# EAGLE board Sensor_Board_Try2 (EAGLE 8.0.2)
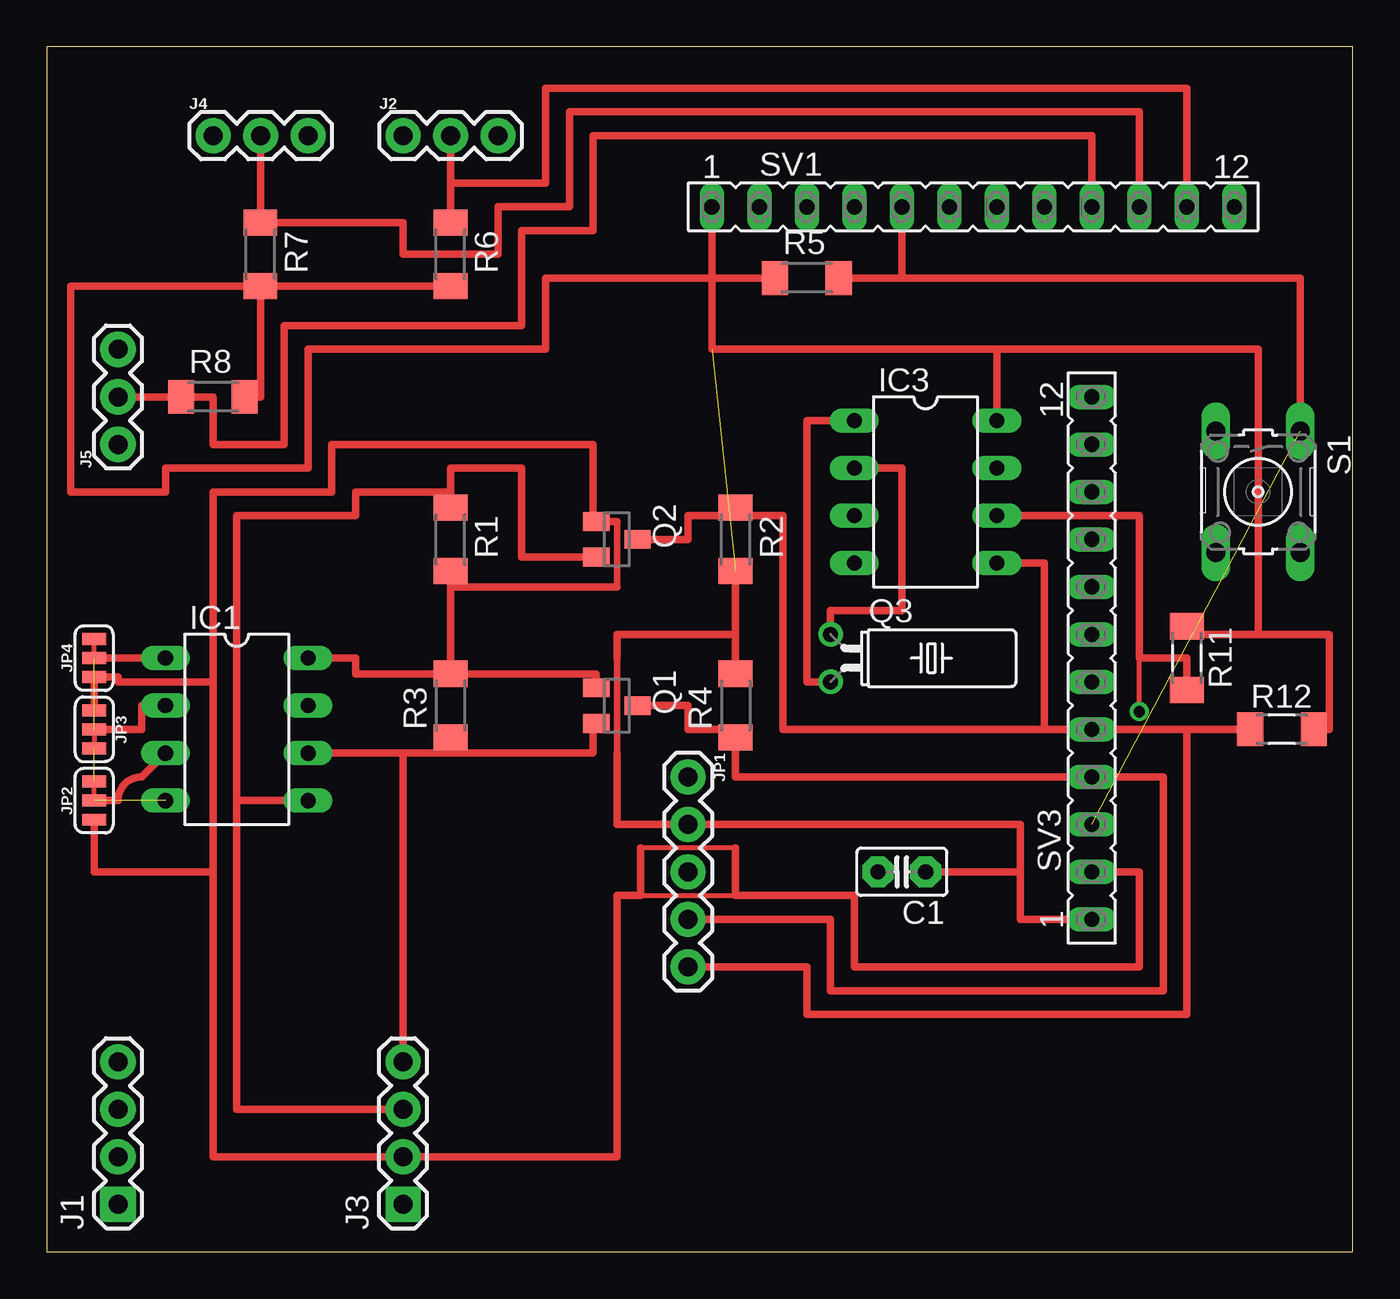
[diagram p0: board, top side]
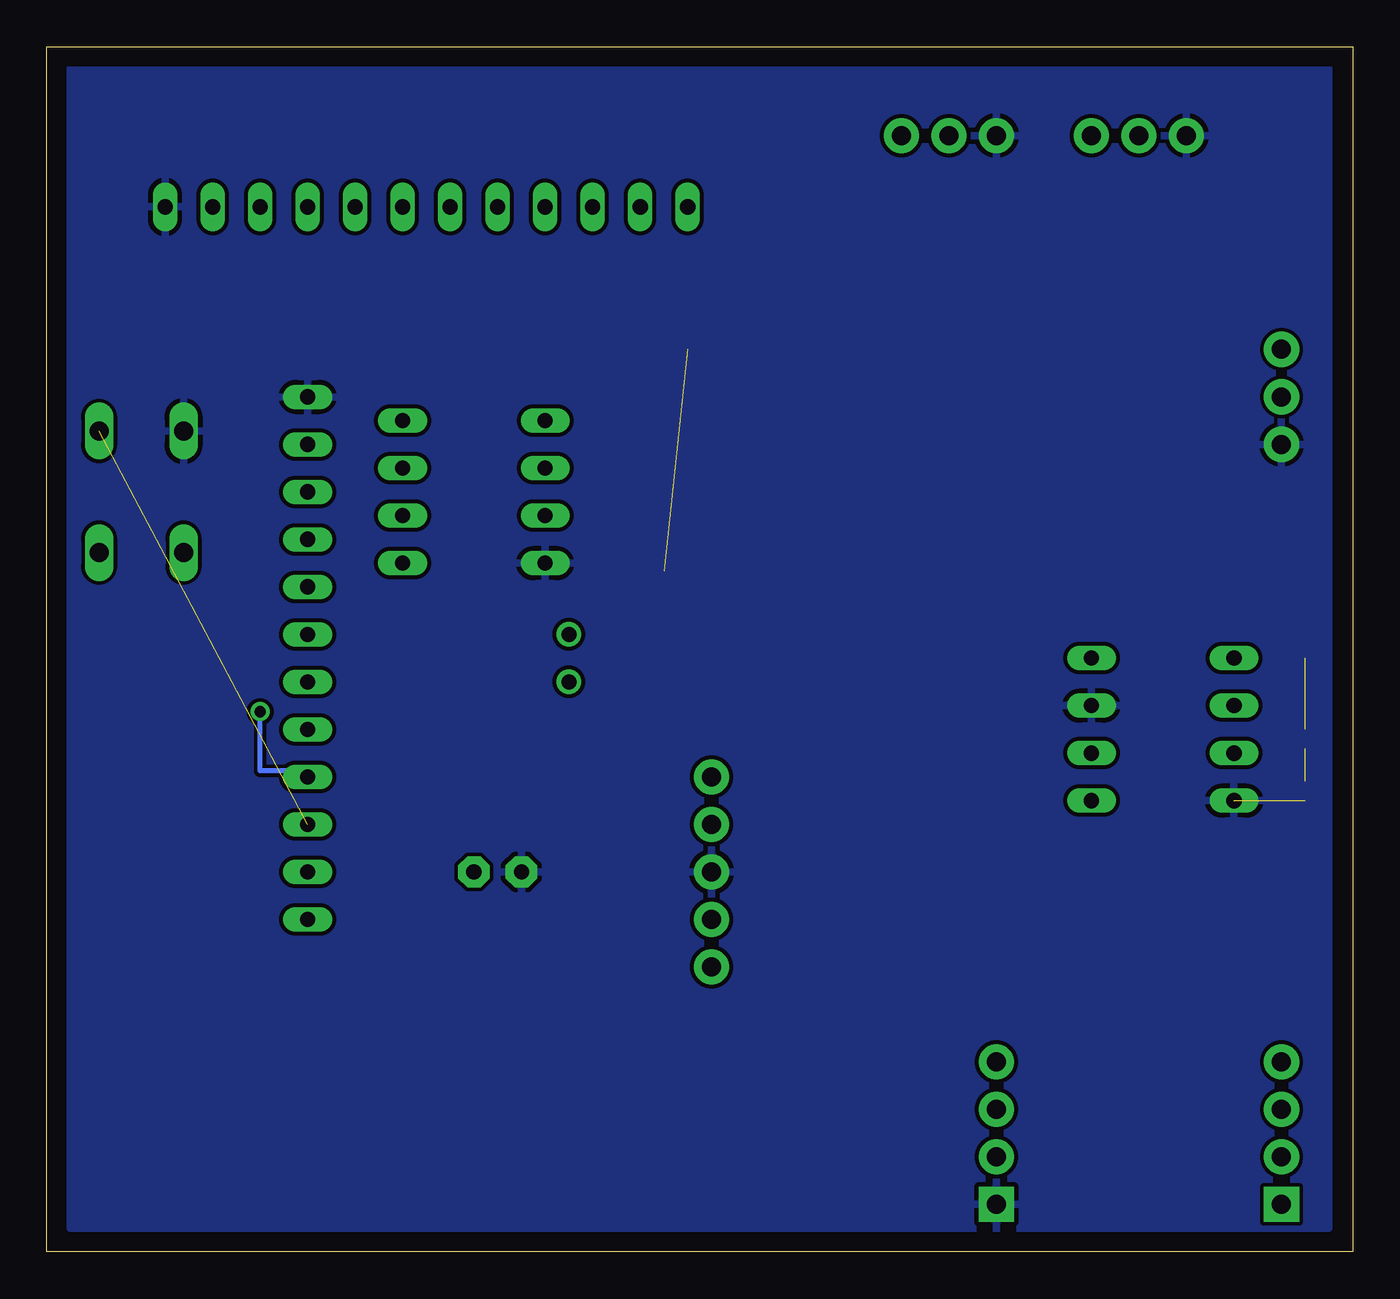
[diagram p1: board, bottom side, seen from below]

Size 69.83 x 64.44 mm. Coordinates in mm from the lower left corner, seen from the top.
Outline: 0,0 69.83,0 69.83,64.44 0,64.44 0,0
Copper layers (1*16): Top 0.035mm / dielectric 1.5mm / Bottom 0.035mm
Design rules "default": minimum track width 10mil, minimum drill 24mil, track to track 8mil, track to pad 8mil, pad to pad 8mil, via to via 8mil, smd to smd 8mil, copper to edge 40mil, drill to drill 8mil, minimum pad ring 10mil, minimum via ring 8mil, stop-mask expansion 4mil, vias tented up to drill 0mil, thermal gap 10mil

## Footprints (pad centres in the part's own frame; a part is rotated, then mirrored left to right if it is on the bottom)
C025-025X050 = drill 0.813 pad 1.676 octagon: 1 -1.27,0; 2 1.27,0
DIL08 = drill 0.813 long: 1 -3.81,-3.81; 2 -1.27,-3.81; 3 1.27,-3.81; 4 3.81,-3.81; 5 3.81,3.81; 6 1.27,3.81; 7 -1.27,3.81; 8 -3.81,3.81
1X04 = drill 1.016 pad 1.88 square: 1 0,0 | drill 1.016 pad 1.88: 2 2.54,0; 3 5.08,0; 4 7.62,0
1X03 = drill 1.016 pad 1.88: 1 0,0; 2 2.54,0; 3 5.08,0
1X05 = drill 1.016 pad 1.88: 1 0,0; 2 2.54,0; 3 5.08,0; 4 7.62,0; 5 10.16,0
SMT-JUMPER_3_1-NC_TRACE_SILK = smd 0.635 x 1.27: 1 -1.016,0; 2 0,0; 3 1.016,0
SOT23 = smd 1 x 1.4: 1 -0.95,-1.1; 2 0.95,-1.1; 3 0,1.1
TC38H = drill 0.813: 1 -1.27,0; 2 1.27,0
M1406 = smd 1.4 x 1.8: 1 -1.7,0; 2 1.7,0
B3F-10XX = drill 1.016 long: 1 -3.251,2.261; 2 3.251,2.261; 3 -3.251,-2.261; 4 3.251,-2.261
FE12 = drill 0.813 long: 1 -13.97,0; 2 -11.43,0; 3 -8.89,0; 4 -6.35,0; 5 -3.81,0; 6 -1.27,0; 7 1.27,0; 8 3.81,0; 9 6.35,0; 10 8.89,0; 11 11.43,0; 12 13.97,0

## Placement (x,y rotation side)
C1  0.1uF  [C025-025X050]  45.72,20.32 180 top
IC1  AT24CP  [DIL08]  10.16,27.94 270 top
IC3  DS1307  [DIL08]  46.99,40.64 270 top
J1  [1X04]  3.81,2.54 90 top
J2  [1X03]  19.05,59.69 0 top
J3  [1X04]  19.05,2.54 90 top
J4  [1X03]  8.89,59.69 0 top
J5  [1X03]  3.81,43.18 90 top
JP1  [1X05]  34.29,25.4 270 top
JP2  JUMPER-SMT_3_1-NC_TRACE_SILK  [SMT-JUMPER_3_1-NC_TRACE_SILK]  2.54,24.13 90 top
JP3  JUMPER-SMT_3_1-NC_TRACE_SILK  [SMT-JUMPER_3_1-NC_TRACE_SILK]  2.54,27.94 270 top
JP4  JUMPER-SMT_3_1-NC_TRACE_SILK  [SMT-JUMPER_3_1-NC_TRACE_SILK]  2.54,31.75 90 top
Q1  BSS123  [SOT23]  30.48,29.21 270 top
Q2  BSS123  [SOT23]  30.48,38.1 270 top
Q3  32.768  [TC38H]  41.91,31.75 270 top
R1  10K  [M1406]  21.59,38.1 270 top
R2  10K  [M1406]  36.83,38.1 270 top
R3  10K  [M1406]  21.59,29.21 90 top
R4  10K  [M1406]  36.83,29.21 90 top
R5  10k  [M1406]  40.64,52.07 0 top
R6  4.7K  [M1406]  21.59,53.34 270 top
R7  4.7K  [M1406]  11.43,53.34 270 top
R8  4.7K  [M1406]  8.89,45.72 0 top
R11  4.7K  [M1406]  60.96,31.75 270 top
R12  4.7K  [M1406]  66.04,27.94 0 top
S1  [B3F-10XX]  64.77,40.64 270 top
SV1  [FE12]  49.53,55.88 0 top
SV3  [FE12]  55.88,31.75 90 top

## Library data of the parts
C1 IC3 R11 R12 = adafruit
IC1 = atmel; MPN: AT24C1024BW-SH-B; OC_FARNELL: 1362646; OC_NEWARK: 03P2044
J1 J3 = SparkFun-Connectors; PROD_ID: CONN-09696
J2 J4 J5 JP1 = SparkFun-Connectors
JP2-JP4 = SparkFun-Jumpers
Q1 Q2 = transistor-small-signal
Q3 = crystal
R1-R4 R6-R8 = resistor
R5 = rcl
S1 = switch-omron; MPN: B3F-1000; OC_FARNELL: 176432; OC_NEWARK: 36M3542
SV1 SV3 = con-lsta; OC_FARNELL: unknown; OC_NEWARK: unknown

## Nets
3V: IC1.8 J3.2 JP2.1 JP3.1 JP4.1 Q1.1 Q2.1 R1.2 R3.2 SV3.2
5V: C1.1 IC3.8 JP1.2 R2.2 R4.2 R5.1 R6.2 R7.2 R8.2 R11.1 R12.2 SV1.1 SV3.1
A0: IC1.1 JP4.2
A1: IC1.2 JP3.2
A2: IC1.3 JP2.2
ADC0: SV3.9
ADC1: SV3.8
ADC2: SV3.7
ADC3: SV3.6
ADC6: SV3.11
ADC7: SV3.10
GND: C1.2 IC1.4 IC1.7 IC3.4 J2.1 J3.1 J4.1 J5.1 JP1.3 JP2.3 JP3.3 JP4.3 S1.3 SV1.12 SV3.12
MOSI: SV1.4
MOSO: SV1.3
N$1: J1.1
N$2: J1.2
N$3: J1.3
N$4: J1.4
N$5: JP1.1
N$6: IC3.3
N$14: IC3.1 Q3.2
N$15: IC3.2 Q3.1
OC1A: SV1.7
OC1B: SV1.6
PB0: SV1.8
PD5: J2.2 R6.1 SV1.11
PD6: J4.2 R7.1 SV1.10
PD7: J5.2 R8.1 SV1.9
RESET: R5.2 S1.1 SV1.5 SV3.3
SCK: SV1.2
SCL: IC3.6 JP1.4 Q1.3 R4.1 R11.2 SV3.4
SCLL: IC1.6 J3.4 Q1.2 R3.1
SDA: IC3.5 JP1.5 Q2.3 R2.1 R12.1 SV3.5
SDAL: IC1.5 J3.3 Q2.2 R1.1
SQW: IC3.7

## Tracks (layer width: path | path; a pad name or v marks a point on that pad's centre or on a via)
3V
  Top 0.254: 31.75,19.05 36.83,19.05 | 36.83,21.59 31.75,21.59
  Top 0.356: 30.48,39.05 30.48,35.56
  Top 0.406: 21.59,35.56 R3.2 | 21.59,35.56 R1.2 | 30.48,39.05 Q2.1 29.21,39.05 29.21,43.18 15.24,43.18 15.24,40.64 8.89,40.64 8.89,30.48 | 30.48,35.56 21.59,35.56 | R3.2 29.38,30.91 Q1.1 | R3.2 16.51,30.91 16.51,31.75 IC1.8 | 8.89,30.48 8.89,20.32 | 8.89,20.32 8.89,5.08 J3.2 30.48,5.08 30.48,19.05 31.75,19.05 31.75,21.59 | SV3.2 58.42,20.32 58.42,15.24 43.18,15.24 43.18,19.05 36.83,19.05 36.83,21.59 | JP3.1 JP4.1 3.81,30.73 3.81,30.48 8.89,30.48 | JP2.1 2.54,20.32 8.89,20.32
5V  (1 unrouted)
  Top 0.356: 30.48,26.67 30.48,31.75
  Top 0.406: 36.83,33.02 R4.2 | 36.83,33.02 30.48,33.02 30.48,31.75 | R2.2 36.83,33.02 | R6.2 R7.2 | 35.56,52.07 SV1.1 | 35.56,52.07 R5.1 | R8.2 11.43,45.72 R7.2 | R7.2 1.27,51.64 1.27,40.64 6.35,40.64 6.35,41.91 13.97,41.91 13.97,48.26 26.67,48.26 26.67,52.07 35.56,52.07 | 52.07,20.32 52.07,17.78 SV3.1 | 52.07,20.32 52.07,22.86 JP1.2 30.48,22.86 30.48,26.67 | 50.8,48.26 IC3.8 | 50.8,48.26 35.56,48.26 35.56,52.07 | 50.8,48.26 64.77,48.26 64.77,33.02 | 52.07,20.32 C1.1 | 64.77,33.02 60.96,33.02 R11.1 | R12.2 68.58,27.94 68.58,33.02 64.77,33.02
A0
  Top 0.406: IC1.1 JP4.2
A1
  Top 0.406: JP3.2 5.08,27.94 5.08,29.21 IC1.2
A2
  Top 0.406: IC1.3 5.08,25.4 arc90 3.81,24.13 JP2.2
GND  (3 unrouted)
  pour Bottom: 1.27,63.5 68.58,63.5 68.58,1.27 1.27,1.27
N$14
  Top 0.406: Q3.2 40.64,30.48 40.64,44.45 IC3.1
N$15
  Top 0.406: Q3.1 41.91,34.29 45.72,34.29 45.72,41.91 IC3.2
PD5
  Top 0.406: R6.1 21.59,57.15 | 21.59,57.15 J2.2 | 21.59,57.15 26.67,57.15 26.67,62.23 60.96,62.23 SV1.11
PD6
  Top 0.406: J4.2 R7.1 19.05,55.04 19.05,53.34 24.13,53.34 24.13,55.88 27.94,55.88 27.94,60.96 58.42,60.96 SV1.10
PD7
  Top 0.406: J5.2 R8.1 8.89,45.72 8.89,43.18 12.7,43.18 12.7,49.53 25.4,49.53 25.4,54.61 29.21,54.61 29.21,59.69 55.88,59.69 SV1.9
RESET  (1 unrouted)
  Top 0.406: R5.2 45.72,52.07 | 45.72,52.07 SV1.5 | 45.72,52.07 67.03,52.07 S1.1
SCL  (via drill 0.61)
  Top 0.254: v58.42,28.89 58.42,31.75
  Top 0.406: Q1.3 34.29,29.21 34.29,27.94 36.83,27.94 R4.1 36.83,25.4 SV3.4 59.69,25.4 59.69,13.97 41.91,13.97 41.91,17.78 JP1.4 | IC3.6 58.42,39.37 58.42,31.75 60.96,31.75 60.96,30.48 R11.2
  Bottom 0.254: v58.42,28.89 58.42,25.72 56.2,25.72 SV3.4
SCLL
  Top 0.406: 19.05,26.67 IC1.6 | 21.59,26.67 19.05,26.67 | 21.59,26.67 R3.1 | J3.4 19.05,26.67 | Q1.2 29.21,28.26 29.21,26.67 21.59,26.67
SDA
  Top 0.406: 53.34,27.94 39.37,27.94 39.37,39.37 36.83,39.37 | 53.34,27.94 SV3.5 R12.1 60.96,27.94 60.96,12.7 40.64,12.7 40.64,15.24 JP1.5 | Q2.3 34.29,38.1 34.29,39.37 36.83,39.37 | 36.83,39.37 R2.1 | 53.34,27.94 53.34,36.83 IC3.5
SDAL
  Top 0.406: 21.59,40.64 21.59,41.91 25.4,41.91 25.4,37.15 Q2.2 | 21.59,40.64 R1.1 | 11.43,24.13 IC1.5 10.16,24.13 | 21.59,40.64 16.51,40.64 16.51,39.37 10.16,39.37 10.16,24.13 | 10.16,24.13 10.16,7.62 J3.3